# Altium PCB LV1.PCBDOC (part 2 of 2)
Units mm, origin at the board's own origin, x right, y up, seen from the top; angles counter-clockwise.
Board outline 220.06 x 100 mm, 4 copper layers (Component Side, Signal Layer 1, Signal Layer 2, Bottom Layer), stack 0.905 mm thick; 187 components, 117 nets, 633 pads, 195 vias.
Unrouted connection lines stored in the file: 13.
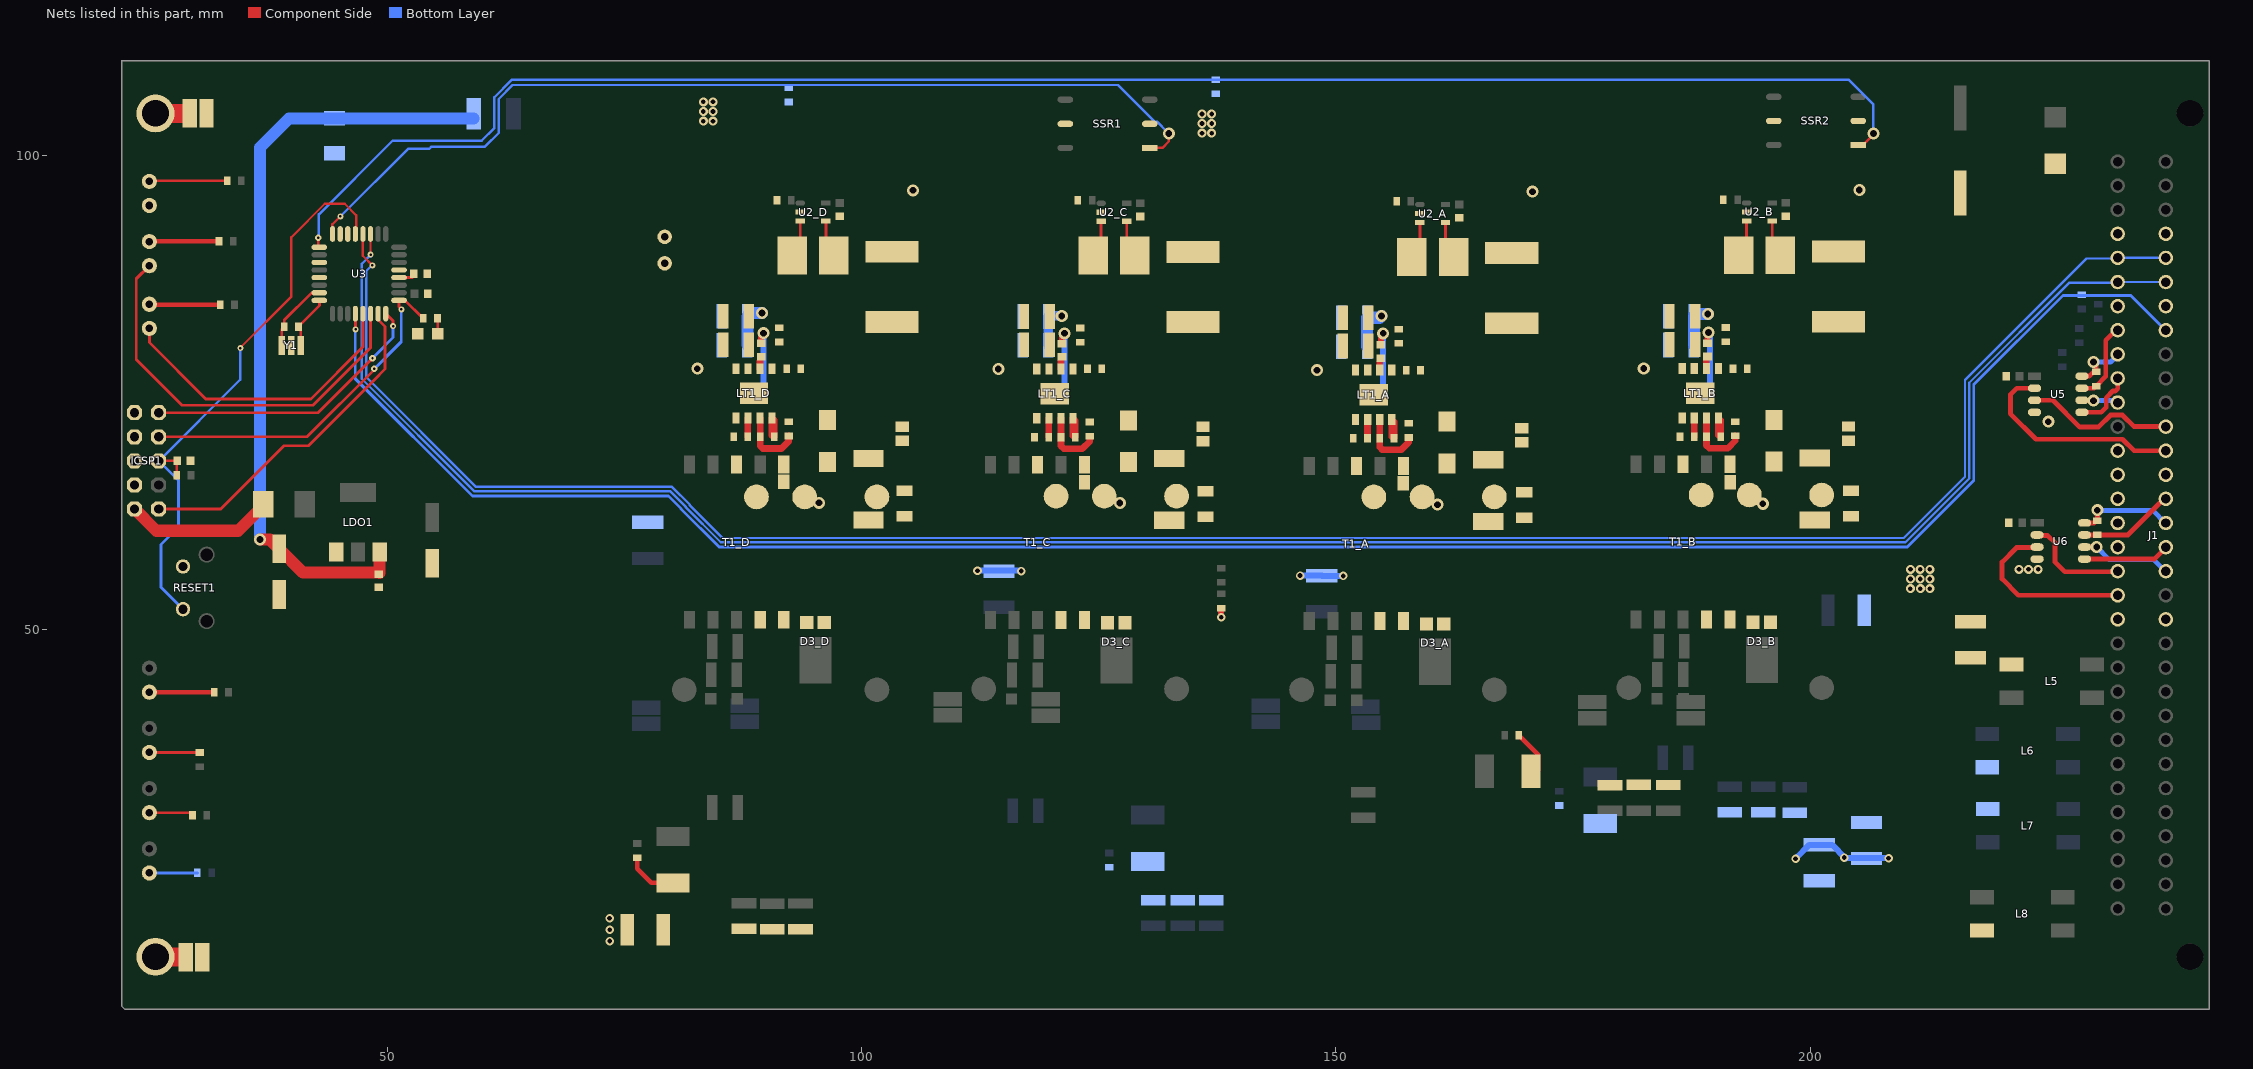
[diagram p4: the nets of this part, all layers, seen from the top]

## Via types
v1: diameter 1.27, hole 0.711, Component Side to Bottom Layer, 133 vias
v2: diameter 0.95, hole 0.5, Component Side to Bottom Layer, 24 vias
v3: diameter 0.635, hole 0.254, Component Side to Bottom Layer, 14 vias
v4: diameter 0.9, hole 0.5, Component Side to Bottom Layer, 13 vias
v5: diameter 0.762, hole 0.381, Component Side to Bottom Layer, 4 vias
v6: diameter 0.672, hole 0.381, Component Side to Bottom Layer, 4 vias
v7: diameter 0.7, hole 0.254, Component Side to Bottom Layer, 3 vias

## Nets (pads, with @x,y where several pads share a name; then routed paths per layer and width w, separated by ;. In a path a pad name is that pad's centre, name@x,y a point inside that pad or via, vN(x,y) a via of type N, cw(c..) or ccw(c..) an arc to the next point about the centre after c; other vN are vias at no path point) (continued)
ADRS3: J1.7 R18.2 U3.12 | length 223.5
  Component Side w0.3: v3@46.64,81.64 U3.12@46.64,83.34
  Bottom Layer w0.3: v3@46.63,81.66 46.63,76.483 58.988,64.125 79.647,64.125 80.97,62.802 80.97,62.747 84.958,58.759 210.236,58.759 217.241,65.764 217.241,75.852 226.631,85.242 233.782,85.242 J1.7@237.49,81.534
  other v3: 46.664,81.688
AREF: AC1.2 U3.20 | length 1.4
  Component Side w0.3: U3.20@51.24,87.14 AC1.2@52.66,87.14
DIB: J1.11 U5.3 | length 16.1
  Component Side w0.508: U5.3@223.64,74.209 225.591,74.209 228.426,71.374 230.378,71.374 231.648,72.644 231.904,72.644 231.906,72.646 232.914,72.646 234.13,71.43 J1.11@237.49,71.43
EN1: AR4.2 SSR1.1 U3.32 | length 101.9
  Component Side w0.254: U3.32@44.21,92.24 44.21,92.744 v3(45.054,93.588) ; SSR1.1@130.378,100.813 131.708,100.813 132.385,101.49 v1(132.385,102.337)
  Bottom Layer w0.254: v3@45.09,93.6 52.2,100.71 54.43,100.71 54.66,100.94 60.3,100.94 61.747,102.387 61.747,105.969 63.221,107.442 127.025,107.442 130.886,103.581 131.14,103.581 v1@132.258,102.464
EN2: AR5.2 SSR2.1 U3.1 | length 181.2
  Component Side w0.254: U3.1@42.74,90.41 42.744,90.414 v7(42.744,91.338) ; SSR2.1@205.054,101.117 205.562,101.117 206.68,102.235 v1(206.68,102.337) v1@206.578,102.235
  Bottom Layer w0.254: v7@42.8,91.41 42.8,93.8 50.575,101.575 59.969,101.575 61.293,102.899 61.293,106.157 63.112,107.975 204.089,107.975 206.629,105.435 v1@206.629,102.591
GND: AC1.1 AC2.1 AC3.2 AC4.1 AR4.1 AR5.1 C1.2 C2.2 C3_A.1 C3_B.1 C3_C.1 C3_D.1 C4_A.1 C4_B.1 C4_C.1 C4_D.1 C6_A.1 C6_B.1 C6_C.1 C6_D.1 C7_A.1 C7_B.1 C7_C.1 C7_D.1 C8_A.1 C8_B.1 C8_C.1 C8_D.1 C11_A.2 C11_B.2 C11_C.2 C11_D.2 C25.1 C26.1 C39.1 C40.2 C45.1 C46.1 C47.1 C48.1 C49.2 C50.1 C51.2 DTVS1.2 DTVS2.2 ICSP1.4 ICSP1.6 ICSP1.8 ICSP1.10 J1.3 J1.6 J1.13 J1.19 J1.35 J1.38 J1.44 J1.45 J1.46 J1.47 J1.48 J1.51 LDO1.1 LED1.C LED2.1 LT1_A.4 LT1_B.4 LT1_C.4 LT1_D.4 NTC1.1 pad.2@94,64.02 pad.2@125.58,64.1 pad.2@159.08,64.02 pad.2@193.58,64.22 pad.3@79.248,91.44 pad.4 pad.7@30.5,15.5 pad.7@30.95,104.45 R1_A.1 R1_B.1 R1_C.1 R1_D.1 R5_A.1 R5_B.1 R5_C.1 R5_D.1 RESET1.1 Rref1_A.2 Rref1_B.2 Rref1_C.2 Rref1_D.2 SSR1.2 SSR2.2 U2_A.2 U2_B.2 U2_C.2 U2_D.2 U3.3 U3.5 U3.21 U5.4 U6.4 Y1.2 | length 48.1
  Component Side w0.635: C11_D.2@89.408,80.202 89.408,81.026 v1(89.662,81.28) ; C11_C.2@121.128,80.182 121.128,81.006 v1(121.382,81.26) ; v4@137.91,51.45 NTC1.1@137.91,52.3 ; C11_A.2@154.728,80.052 154.728,80.876 v1@154.982,81.13 ; C11_B.2@189.168,80.222 189.168,81.046 v1@189.422,81.3
  Bottom Layer w0.635: 89.662,75.692 v1(89.662,81.28) ; v4(112.22,56.24) 114.05,56.24 114.06,56.25 v4@116.93,56.25 ; 121.382,75.672 v1(121.382,81.26) ; v4(146.22,55.73) 148.53,55.73 C45.1@148.56,55.7 ; C45.1@148.61,55.69 v4(150.77,55.69) ; 154.982,75.542 v1@154.982,81.13 ; 189.422,75.712 v1@189.422,81.3 ; v4(198.45,25.89) 199.9,27.34 C49.2@200.87,27.34 ; C49.2@200.94,27.35 202.3,27.35 v4@203.71,25.94 ; v4@203.74,25.91 v4@203.71,25.94 ; v4@208.19,25.94 v4@203.71,25.94
  other v1: 160.7,63.2 195,63.3 127.22,63.38 95.5,63.4 225.1,71.95 148.01,77.384 114.41,77.514 82.69,77.534 182.45,77.554 154.982,81.26 189.282,81.36 170.73,96.192 105.41,96.342 205.17,96.362
  other v2: 210.55,54.35 211.6,54.35 212.6,54.35 210.566,55.372 211.582,55.372 212.598,55.372 210.566,56.388 211.582,56.388 212.598,56.388 221.996,56.388 223.012,56.388 224.028,56.388 135.89,102.362 136.906,102.362 135.89,103.378 136.906,103.378 83.312,103.632 84.328,103.632 135.89,104.394 136.906,104.394 83.312,104.648 84.328,104.648 83.312,105.664 84.328,105.664
  other v4: 73.46,17.2 73.45,18.39 73.44,19.6 208.26,25.94 203.59,26 137.9,51.34 116.84,56.2
LED1: D9.1 U3.14 | length 43.2
  Component Side w0.3: D9.1@24.924,88.392 23.55,87.018 23.55,78.51 28.38,73.68 42.18,73.68 48.24,79.74 U3.14@48.24,83.29
LED2: D10.1 U3.13 | length 32.2
  Component Side w0.3: D10.1@24.924,81.788 24.924,80.296 30.87,74.35 41.96,74.35 47.46,79.85 U3.13@47.46,83.29
MISO: ICSP1.9 U3.16 | length 30.8
  Component Side w0.3: ICSP1.9@25.908,72.898 42.698,72.898 v7@48.385,78.585 ; U3.16@49.85,83.35 50.614,82.586 v3(50.614,82.018)
  Bottom Layer w0.3: v7(48.444,78.638) 50.62,80.814 v3@50.62,82.02
MOSI: ICSP1.1 U3.15 | length 36
  Component Side w0.3: ICSP1.1@25.908,62.738 32.448,62.738 39.12,69.41 41.69,69.41 41.69,69.42 42.057,69.787 42.057,69.79 48.57,76.303 48.573,76.303 49.76,77.49 49.76,81.986 49.03,82.716 49.03,83.22 U3.15@49.01,83.24
NetAC2_2: AC2.2 C1.1 DTVS1.1 F1.2 LDO1.3 | length 81.1
  Component Side w1.27: v1(36.59,59.52) 37.62,59.52 C1.1@38.51,58.63 ; C1.1@38.608,58.547 41.105,56.05 AC2.2@49.15,56.05 ; AC2.2@49.19,56.01 LDO1.3@49.19,58.23
  Bottom Layer w1.27: v1@36.6,59.6 36.6,100.862 39.624,103.886 F1.2@59.114,103.886
NetAR2_1: AR2.1 LED1.A | length 1.6
  Component Side w0.254: LED1.A@55.33,81.23 AR2.1@55.33,82.81
NetAR6_2: AR6.2 LED2.2 | length 8
  Component Side w0.3: LED2.2@25.146,97.344 AR6.2@33.12,97.344
NetC4_A_2: C4_A.2 C5_A.2 C6_A.2 C7_A.2 C8_A.2 D2_A.1 F2_A.2 LT1_A.3 pad.1@154,64.02 pad.7@157.1,65.45 R3_A.2 T1_A.5 | length 4.6
  Bottom Layer w1.27: C8_A.2@153.284,79.86 C7_A.2@153.284,82.908 154.608,82.908 v1(154.8,83.1)
NetC4_B_2: C4_B.2 C5_B.2 C6_B.2 C7_B.2 C8_B.2 D2_B.1 F2_B.2 LT1_B.3 pad.1@188.5,64.22 pad.7@191.55,65.55 R3_B.2 T1_B.5 | length 4.6
  Bottom Layer w1.27: C8_B.2@187.724,80.03 C7_B.2@187.724,83.078 187.946,83.3 v1(189.2,83.3)
NetC4_C_2: C4_C.2 C5_C.2 C6_C.2 C7_C.2 C8_C.2 D2_C.1 F2_C.2 LT1_C.3 pad.1@120.5,64.1 pad.7@123.5,65.55 R3_C.2 T1_C.5 | length 4.5
  Bottom Layer w1: C8_C.2@119.684,79.99 C7_C.2@119.684,83.038 119.746,83.1 v1(121.1,83.1)
NetC4_D_2: C4_D.2 C5_D.2 C6_D.2 C7_D.2 C8_D.2 D2_D.1 F2_D.2 LT1_D.3 pad.1@88.92,64.02 pad.7@91.8,65.6 R3_D.2 T1_D.5 | length 4.7
  Bottom Layer w1.27: C8_D.2@87.964,80.01 C7_D.2@87.964,83.058 88.306,83.4 v1(89.5,83.4)
NetC5_A_1: C5_A.1 R4_A.2
NetC5_B_1: C5_B.1 R4_B.2
NetC5_C_1: C5_C.1 R4_C.2
NetC5_D_1: C5_D.1 R4_D.2
NetC11_A_1: C11_A.1 LT1_A.2 | length 0.8
  Component Side w0.7: LT1_A.2@154.614,77.384 154.614,78.203
NetC11_B_1: C11_B.1 LT1_B.2 | length 0.8
  Component Side w0.7: LT1_B.2@189.054,77.554 189.054,78.373
NetC11_C_1: C11_C.1 LT1_C.2 | length 0.8
  Component Side w0.7: LT1_C.2@121.014,77.514 121.014,78.333
NetC11_D_1: C11_D.1 LT1_D.2 | length 0.8
  Component Side w0.7: LT1_D.2@89.294,77.534 89.294,78.353
NetC27_2: C27.2 C28.2 C29.2 C51.1 L1.1 L5.1 R24.1 | length 4.6
  Component Side w0.5: R24.1@169.28,38.91 171.34,36.85 L1.1@171.34,35.17
NetC31_2: C31.2 C32.2 C33.2 C50.2 L2.1 L6.3 R25.2
NetC35_1: C35.1 C36.1 C37.1 C49.1 L3.1 L7.4 R26.2
NetC41_1: C41.1 C42.1 C43.1 C48.2 L4.1 L8.2 R31.1 | length 5.8
  Component Side w0.5: R31.1@76.36,25.98 76.36,24.84 77.84,23.36 L4.1@80.43,23.36
NetD1_2: D1.2 ICSP1.2 | length 15.8
  Component Side w1.27: ICSP1.2@23.368,62.738 25.654,60.452 34.29,60.452 D1.2@37.084,63.246
NetD2_A_2: D2_A.2 D5_A.1 pad.6@166.7,64.02
NetD2_B_2: D2_B.2 D5_B.1 pad.6@201.2,64.22
NetD2_C_2: D2_C.2 D5_C.1 pad.6@133.2,64.1
NetD2_D_2: D2_D.2 D5_D.1 pad.6@101.62,64.02
NetD3_A_1: D3_A.1 T1_A.6 T1_A.7
NetD3_B_1: D3_B.1 T1_B.6 T1_B.7
NetD3_C_1: D3_C.1 T1_C.6 T1_C.7
NetD3_D_1: D3_D.1 T1_D.6 T1_D.7
NetD9_2: D9.2 R27.1 | length 7.4
  Component Side w0.5: D9.2@24.892,90.983 R27.1@32.27,90.983
NetD10_2: D10.2 R28.1 | length 7.5
  Component Side w0.5: D10.2@24.943,84.277 R28.1@32.397,84.277
NetD11_1: D11.1 R30.1 | length 5.3
  Bottom Layer w0.3: D11.1@24.67,24.384 R30.1@29.984,24.384
NetD12_1: D12.1 R32.1 | length 4.6
  Component Side w0.3: D12.1@24.67,30.734 R32.1@29.222,30.734
NetD13_1: D13.1 R33.1 | length 5.3
  Component Side w0.3: D13.1@24.67,37.084 R33.1@29.984,37.084
NetD14_1: D14.1 R34.1 | length 6.5
  Component Side w0.5: D14.1@25.146,43.434 R34.1@31.662,43.434
NetF2_A_1: F2_A.1 R2_A.2 U2_A.4 | length 2.8
  Component Side w0.3: R2_A.2@161.552,90.172 U2_A.4@161.552,92.944
NetF2_B_1: F2_B.1 R2_B.2 U2_B.4 | length 2.8
  Component Side w0.3: R2_B.2@195.992,90.342 U2_B.4@195.992,93.114
NetF2_C_1: F2_C.1 R2_C.2 U2_C.4 | length 2.8
  Component Side w0.3: R2_C.2@127.952,90.302 U2_C.4@127.952,93.074
NetF2_D_1: F2_D.1 R2_D.2 U2_D.4 | length 2.8
  Component Side w0.3: R2_D.2@96.232,90.322 U2_D.4@96.232,93.094
NetJ1_14: J1.14 R23.1 U6.7 | length 10.1
  Component Side w0.508: U6.7@228.914,60.008 233.49,60.008 237.236,63.754 J1.14@237.49,63.754
NetJ1_15: J1.15 R23.2 U6.8 | length 10.5
  Component Side w0.508: U6.8@228.914,61.278 229.934,61.278 R23.2@230.264,61.608 ; v1(230.264,62.624) R23.2@230.264,61.608 ; R23.2@230.378,61.722 R23.2@230.264,61.608
  Bottom Layer w0.508: v1(230.264,62.624) 230.294,62.594 236.11,62.594 J1.15@237.49,61.214
NetJ1_16: J1.16 U6.5 | length 9.1
  Component Side w0.508: U6.5@228.914,57.468 236.284,57.468 J1.16@237.49,58.674
NetJ1_17: J1.17 U6.6 | length 9.7
  Component Side w0.508: U6.6@228.914,58.738 v1(230.188,58.738)
  Bottom Layer w0.508: v1(230.188,58.738) 231.52,57.406 232.914,57.406 232.916,57.404 236.22,57.404 J1.17@237.49,56.134
NetJ1_39: J1.39 R22.2 U5.7 | length 8.3
  Component Side w0.508: U5.7@228.64,75.479 R22.2@229.911,75.479 ; R22.2@230.124,75.704 231.14,76.72 231.14,80.518 J1.39@232.41,81.788
NetJ1_40: J1.40 R22.1 U5.8 | length 5.4
  Component Side w0.508: U5.8@228.64,76.749 229.403,76.749 R22.1@229.87,77.216 ; v1(229.87,78.232) 230.124,77.978 R22.1@230.124,77.204
  Bottom Layer w0.508: v1(229.87,78.232) 231.648,78.232 J1.40@232.41,78.994
NetJ1_41: J1.41 U5.5 | length 6.4
  Component Side w0.508: U5.5@228.64,72.939 230.673,72.939 231.194,73.46 231.194,74.474 231.906,75.186 232.158,75.186 232.41,75.438 J1.41@232.41,76.454
NetJ1_42: J1.42 U5.6 | length 3.9
  Component Side w0.508: U5.6@228.64,74.209 229.829,74.209 v1(229.87,74.168)
  Bottom Layer w0.508: v1(229.87,74.168) 232.156,74.168 J1.42@232.41,73.914
NetLT1_A_1: LT1_A.1 R3_A.1 R5_A.2
NetLT1_A_6: LT1_A.6 Rfb1_A.1 | length 2
  Component Side w0.7: Rfb1_A.1@153.332,70.189 LT1_A.6@153.332,72.165
NetLT1_A_7: LT1_A.7 Rref1_A.1 Rtc1_A.2 | length 6.9
  Component Side w0.7: LT1_A.7@154.626,72.165 Rtc1_A.2@154.626,70.189 154.626,69.268 154.916,68.978 156.876,68.978 157.662,69.764 Rref1_A.1@157.662,70.284
NetLT1_A_8: LT1_A.8 Rtc1_A.1 | length 3.9
  Component Side w0.7: Rtc1_A.1@155.884,70.347 LT1_A.8@155.884,72.177 156.126,71.935 Rtc1_A.1@156.126,70.189
NetLT1_B_1: LT1_B.1 R3_B.1 R5_B.2
NetLT1_B_6: LT1_B.6 Rfb1_B.1 | length 2
  Component Side w0.7: Rfb1_B.1@187.772,70.359 LT1_B.6@187.772,72.335
NetLT1_B_7: LT1_B.7 Rref1_B.1 Rtc1_B.2 | length 6.9
  Component Side w0.7: LT1_B.7@189.066,72.335 Rtc1_B.2@189.066,70.359 189.066,69.438 189.356,69.148 191.316,69.148 192.102,69.934 Rref1_B.1@192.102,70.454
NetLT1_B_8: LT1_B.8 Rtc1_B.1 | length 3.9
  Component Side w0.7: Rtc1_B.1@190.324,70.517 LT1_B.8@190.324,72.347 190.566,72.105 Rtc1_B.1@190.566,70.359
NetLT1_C_1: LT1_C.1 R3_C.1 R5_C.2
NetLT1_C_6: LT1_C.6 Rfb1_C.1 | length 2
  Component Side w0.7: Rfb1_C.1@119.732,70.319 LT1_C.6@119.732,72.295
NetLT1_C_7: LT1_C.7 Rref1_C.1 Rtc1_C.2 | length 6.9
  Component Side w0.7: LT1_C.7@121.026,72.295 Rtc1_C.2@121.026,70.319 121.026,69.398 121.316,69.108 123.276,69.108 124.062,69.894 Rref1_C.1@124.062,70.414
NetLT1_C_8: LT1_C.8 Rtc1_C.1 | length 3.9
  Component Side w0.7: Rtc1_C.1@122.284,70.477 LT1_C.8@122.284,72.307 122.526,72.065 Rtc1_C.1@122.526,70.319
NetLT1_D_1: LT1_D.1 R3_D.1 R5_D.2
NetLT1_D_6: LT1_D.6 Rfb1_D.1 | length 2
  Component Side w0.7: Rfb1_D.1@88.012,70.339 LT1_D.6@88.012,72.315
NetLT1_D_7: LT1_D.7 Rref1_D.1 Rtc1_D.2 | length 6.9
  Component Side w0.7: LT1_D.7@89.306,72.315 Rtc1_D.2@89.306,70.339 89.306,69.418 89.596,69.128 91.556,69.128 92.342,69.914 Rref1_D.1@92.342,70.434
NetLT1_D_8: LT1_D.8 Rtc1_D.1 | length 3.9
  Component Side w0.7: Rtc1_D.1@90.564,70.497 LT1_D.8@90.564,72.327 90.806,72.085 Rtc1_D.1@90.806,70.339
RESET: AC3.1 AR3.1 ICSP1.5 RESET1.2 U3.29 | length 61.5
  Component Side w0.254: ICSP1.5@25.908,67.818 AC3.1@27.788,67.818 ; v3@34.445,79.695 39.89,85.14 39.89,91.39 43.42,94.92 45.52,94.92 46.74,93.7 U3.29@46.74,91.79
  Component Side w0.3: AR3.1@27.81,66.32 AC3.1@27.81,67.76
  Bottom Layer w0.254: ICSP1.5@25.98,67.85 34.51,76.38 v3(34.51,79.7)
  Bottom Layer w0.3: ICSP1.5@25.99,67.76 28.01,65.74 28.01,60.856 26.162,59.008 26.162,54.497 RESET1.2@28.473,52.186
ROB: J1.12 U5.2 | length 22.8
  Component Side w0.508: U5.2@223.64,75.479 221.779,75.479 221.1,74.8 221.1,72.8 223.796,70.104 231.904,70.104 231.906,70.106 232.914,70.106 234.13,68.89 J1.12@237.49,68.89
RX0: U3.30
RXA: J1.49 U6.2 | length 11.2
  Component Side w0.508: U6.2@224.028,59.944 225.044,59.944 225.806,59.182 225.806,57.15 226.822,56.134 232.354,56.134 J1.49@232.41,56.19
SCK: AR2.2 ICSP1.7 U3.17 | length 37.5
  Component Side w0.3: ICSP1.7@25.908,70.358 41.548,70.358 v7@48.65,77.46 ; v3@51.51,83.78 51.24,84.05 U3.17@51.24,84.74 51.88,84.74 AR2.2@53.76,82.86
  Bottom Layer w0.3: v7(48.624,77.518) 51.48,80.374 v3@51.48,83.78
  other v3: 51.484,83.798
SCL: J1.4 J1.36 U3.28 | length 230.8
  Component Side w0.254: U3.28@47.42,91.81 47.42,89.442 v3(48.434,88.428)
  Bottom Layer w0.254: v3@48.374,88.404 47.79,87.82 47.78,87.82 47.78,78.931 47.767,78.918 47.767,78.358 47.78,78.345 47.78,76.65 59.35,65.08 80.009,65.08 81.901,63.188 81.901,63.133 85.344,59.69 209.85,59.69 216.31,66.15 216.31,76.35 229.114,89.154 232.354,89.154 J1.36@232.41,89.21 J1.4@237.49,89.21
SDA: J1.5 J1.37 U3.27 | length 230.3
  Component Side w0.254: v3@48.24,89.75 U3.27@48.24,91.74 U3.27@48.24,91.78 ; v3(48.25,89.55) v3@48.25,89.76
  Bottom Layer w0.254: v3@48.3,89.41 48.144,89.41 47.313,88.579 47.313,76.475 59.162,64.626 79.821,64.626 81.447,63 81.447,62.945 85.156,59.236 210.038,59.236 216.764,65.962 216.764,76.05 227.328,86.614 J1.37@232.41,86.614 ; J1.37@232.41,86.67 J1.5@237.49,86.67
Shield: pad.2@25.57,15.549 pad.2@25.57,104.444 pad.7@28.75,15.5 pad.7@29.2,104.45 | length 6
  Component Side w2: pad.2@25.576,104.45 pad.7@28.85,104.45 ; pad.2@25.619,15.5 pad.7@28.35,15.5
SW_A: D5_A.2 LT1_A.5 R4_A.1 Rfb1_A.2 T1_A.3
SW_B: D5_B.2 LT1_B.5 R4_B.1 Rfb1_B.2 T1_B.3
SW_C: D5_C.2 LT1_C.5 R4_C.1 Rfb1_C.2 T1_C.3
SW_D: D5_D.2 LT1_D.5 R4_D.1 Rfb1_D.2 T1_D.3
TX0: U3.31
TXA: J1.50 U6.3 | length 18.9
  Component Side w0.508: U6.3@223.774,58.674 221.742,58.674 220.218,57.15 220.218,55.372 221.94,53.65 J1.50@232.41,53.65
VINA: R2_C.1 R2_D.1 SSR1.5 U2_C.3 U2_D.3 | length 5.5
  Component Side w0.3: R2_D.1@93.532,90.322 U2_D.3@93.532,93.094 ; R2_C.1@125.252,90.302 U2_C.3@125.252,93.074
VINB: R2_A.1 R2_B.1 SSR2.5 U2_A.3 U2_B.3 | length 5.5
  Component Side w0.3: R2_A.1@158.852,90.172 U2_A.3@158.852,92.944 ; R2_B.1@193.292,90.342 U2_B.3@193.292,93.114
XTAL1: AR1.1 U3.7 Y1.3 | length 7.6
  Component Side w0.3: Y1.3@38.874,80 38.874,81.644 AR1.1@39.15,81.92 ; AR1.1@39.14,81.98 39.14,82.66 42.01,85.53 U3.7@42.8,85.53
XTAL2: AR1.2 U3.8 Y1.1 | length 5.7
  Component Side w0.3: Y1.1@40.89,80 40.89,81.75 40.65,81.99 42.86,84.2 U3.8@42.86,84.71
pads on no net: C39.2 ICSP1.3 J1.0@240.03,15.55 J1.0@240.03,104.45 RESET1.0 SSR1.3 SSR2.3 T1_A.1 T1_A.2 T1_A.4 T1_A.8 T1_B.1 T1_B.2 T1_B.4 T1_B.8 T1_C.1 T1_C.2 T1_C.4 T1_C.8 T1_D.1 T1_D.2 T1_D.4 T1_D.8 U3.2 U3.22

## Polygon pours and split planes (outlines as drawn)
+5VBRTN on Bottom Layer "-5VA_L01_P619" (solid, pour order 3916): 150.246,53.902 141.102,53.902 141.102,41.2 150.246,41.2
+5VARTN on Bottom Layer "-5VA_L01_P619" (solid, pour order 3918): 116.626,54.102 107.482,54.102 107.482,34.036 116.626,34.036
+5VGNDA on Bottom Layer "Component Side-No Net 2" (solid, pour order 3909): 225.64,24.775 225.64,29.22 237.99,29.22 238.48,28.73 238.48,25.19 238.08,24.79
+5VA_FILTERED on Bottom Layer "Component Side-No Net 2" (solid, pour order 3908): 225.78,29.835 225.78,34.28 238.05,34.28 238.54,33.79 238.54,30.25 238.14,29.85
NetC31_2 on Bottom Layer "Component Side-No Net 2" (solid, pour order 3901): 212.37,31.05 216.03,34.71 219.9,34.71 219.9,36.36 213.7,36.36 208.39,31.05
-5VBRTN on Bottom Layer "Component Side-No Net 2" (solid, pour order 3902): 206.591,35.461 211.01,39.88 219.9,39.88 219.9,38.05 213.05,38.05 210.461,35.461
GND on Bottom Layer "GND_L02_P1210" (solid, pour order 3935): 22.86,109.354 238.16,109.354 238.16,60.84 22.86,60.84
+5V on Bottom Layer "Component Side-No Net" (solid, pour order 3914): 42.814,59.368 40.314,59.368 40.314,65.968 40.386,66.04 53.34,66.04 53.34,59.368 44.45,59.368
NetC35_1 on Bottom Layer "Component Side-No Net" (solid, pour order 3930): 125.65,24.85 125.65,20.33 208.33,20.33 208.33,24.85
NetC31_2 on Bottom Layer "Component Side-No Net" (solid, pour order 3915): 173.03,28.61 173.03,31.67 213.02,31.67 209.96,28.61
-5VB on Bottom Layer "Component Side-No Net" (solid, pour order 3920): 184.211,33.022 174.805,33.022 174.805,54.07 184.211,54.07
-5VBRTN on Bottom Layer "Component Side-No Net" (solid, pour order 3907): 194.818,32.45 194.818,36.11 211.11,36.11 207.45,32.45
GND on Bottom Layer "Component Side-No Net" (solid, pour order 3934): 23.045,60.96 23.114,60.891 23.114,17.79 71.51,17.79 71.51,54.851 76.11,60.96
+5VB on Bottom Layer "Component Side-No Net" (solid, pour order 3925): 151.581,41.1 151.581,49.612 165.4,49.612 165.4,41.1
GND on Bottom Layer "GNDbottom" (solid, pour order 3933): 176.315,101.813 176.315,63.326 142.36,63.326 142.36,101.813
-5VBRTN on Bottom Layer "-5VGNDB_L02_P638" (solid, pour order 3928): 202.6,32.454 186.45,32.454 186.45,53.75 202.6,53.75
SW_D on Bottom Layer "SW_LV4_L01_P595" (solid, pour order 3913): 106.058,60.516 85.23,60.516 85.23,72.962 87.262,72.962 87.262,65.088 87.516,64.834 89.294,63.056 89.802,62.548 106.058,62.548
GND on Bottom Layer "Component Side-No Net 2" (solid, pour order 3926): 210.058,50.292 210.058,60.96 237.998,60.96 238.252,60.706 238.252,50.292
GND on Bottom Layer "Component Side-No Net 2" (solid, pour order 3903): 204.98,53.788 212.832,53.788 213.594,53.026 213.848,52.772 213.848,50.232 204.98,50.232
+5VA on Bottom Layer "Component Side-No Net" (solid, pour order 3927): 117.821,29.56 117.821,49.703 131,49.703 131,29.56
+5VARTN on Bottom Layer "Component Side-No Net" (solid, pour order 3932): 107.4,14.559 107.4,19.601 209.79,19.601 209.79,14.502
+5VARTN on Bottom Layer "Component Side-No Net" (solid, pour order 3929): 116.58,14.725 116.58,52.818 107.39,52.818 107.39,14.713
-5VA on Bottom Layer "-5VA_L01_P619" (solid, pour order 3917): 84.976,54.102 75.832,54.102 75.832,41.2 84.976,41.2
-5VARTN on Bottom Layer "Component Side-No Net 2" (solid, pour order 3904): 86.106,57.15 86.106,54.61 75.946,54.61 75.946,58.166 82.55,58.166 83.566,57.15 83.82,57.15
-5VARTN on Bottom Layer "-5VGNDA_L02_P642" (solid, pour order 3931): 99.4,41.2 86.106,41.2 86.106,57.976 99.4,57.976
NetC35_1 on Bottom Layer "Component Side-No Net 2" (solid, pour order 3906): 219.94,32.27 219.98,32.23 219.98,29.6 218,29.6 208.7,20.3 207.21,20.3 207.21,24.84 209.13,24.84 216.56,32.27
+5VARTN on Bottom Layer "Component Side-No Net 2" (solid, pour order 3905): 217.48,28.35 217.48,26.99 217.51,26.96 210.09,19.54 209.66,19.54 209.66,14.47 209.76,14.57 220.22,25.03 220.22,28.35
-5VA on Bottom Layer "Component Side-No Net 1" (solid, pour order 3943): 75.8,39.5 101.7,39.5 101.971,39.771 101.971,44.071 102.5,44.6 105.3,44.6 105.3,37.5 103.4,35.6 75.8,35.6
+5VBRTN on Bottom Layer "Component Side-No Net 1" (solid, pour order 3955): 141.1,39.55 167,39.55 167.271,39.821 167.271,44.121 167.8,44.65 170.6,44.65 170.6,37.55 168.7,35.65 141.1,35.65
GND on Component Side "GND_L01_P3936" (solid, pour order 3936): 75.17,20.05 75.15,20.07 73,20.07 73,16.93 73,16.74 73.37,16.74 74.92,16.74 75.15,16.74
-5VBRTN on Component Side "-5VGNDA_L01_P620" (solid, pour order 3881): 200.8,49.53 200.8,41.7 185.916,41.7 185.916,49.53
-5VB on Component Side "-5VA_L01_P619" (solid, pour order 3880): 184.646,54.102 175.502,54.102 175.502,41.7 184.646,41.7
+5VB on Component Side "-5VGNDA_L01_P620" (solid, pour order 3890): 165.4,49.33 165.4,31.98 151.516,31.98 151.516,49.33
+5VBRTN on Component Side "-5VA_L01_P619" (solid, pour order 3884): 150.246,53.902 141.102,53.902 141.102,27.09 150.246,27.09
+5VA on Component Side "-5VGNDA_L01_P620" (solid, pour order 3891): 132.7,49.53 132.7,41.9 117.896,41.9 117.896,49.53
+5VARTN on Component Side "-5VA_L01_P619" (solid, pour order 3882): 116.626,54.102 107.482,54.102 107.482,41.91 116.626,41.91
GND on Component Side "Component Side-No Net 2" (solid, pour order 3876): 185.74,86.17 185.81,86.1 185.81,79.01 186.86,79.01 186.93,78.94 186.91,78.92 186.91,73.84 175.68,73.84 175.63,73.79 175.68,73.84 175.68,86.26
GND on Component Side "Component Side-No Net 2" (solid, pour order 3875): 151.24,85.95 151.31,85.88 151.31,78.79 152.36,78.79 152.43,78.72 152.41,78.7 152.41,73.62 141.18,73.62 141.13,73.57 141.18,73.62 141.18,86.04
GND on Component Side "Component Side-No Net 2" (solid, pour order 3877): 117.66,85.95 117.73,85.88 117.73,78.79 118.78,78.79 118.85,78.72 118.83,78.7 118.83,73.62 107.6,73.62 107.55,73.57 107.6,73.62 107.6,86.04
VINB on Component Side "Component Side-No Net" (solid, pour order 3863): 193.82,91.448 193.82,87.384 181.378,87.384 181.378,105.368 184.68,105.368 184.68,92.21 185.442,91.448
VINB on Component Side "Component Side-No Net" (solid, pour order 3865): 159.432,91.372 159.432,87.308 146.99,87.308 146.99,105.292 150.292,105.292 150.292,92.134 151.054,91.372
VINA on Component Side "Component Side-No Net" (solid, pour order 3864): 125.882,91.249 125.882,87.185 113.44,87.185 113.44,105.169 116.742,105.169 116.742,92.011 117.504,91.249
NetC4_B_2 on Component Side "NETC11_LV4_2_L01_P618" (solid, remove dead copper, pour order 3888): 205.932,86.126 187.39,86.126 187.39,76.982 191.708,76.982 191.708,66.568 192.47,66.568 195.518,70.886 196.788,70.886 205.932,70.886
GND on Component Side "Component Side-No Net" (solid, pour order 3868): 206.658,93.11 206.658,100.476 190.832,100.476 190.832,93.11
GND on Component Side "GND_L01_P564" (solid, pour order 3819): 194.388,78.074 194.388,75.522 194.388,73.49 192.61,73.49 192.61,76.538 192.864,76.538 192.864,78.074
NetD3_B_1 on Component Side "NETD7_LV4_1_L01_P604" (solid, pour order 3852): 202.039,50.05 202.039,54.114 187.815,54.114 187.815,50.05
SW_B on Component Side "SW_LV4_L01_P595" (solid, pour order 3859): 205.818,60.536 184.99,60.536 184.99,72.982 187.022,72.982 187.022,65.108 187.276,64.854 189.054,63.076 189.562,62.568 205.818,62.568
NetF2_B_1 on Component Side "NETF2_LV4_1_L01_P581" (solid, pour order 3840): 205.818,87.268 197.436,87.268 197.436,88.573 197.436,91.332 198.579,91.332 205.818,91.332
NetD2_B_2 on Component Side "NETD8_LV4_2_L01_P586" (solid, pour order 3843): 202.77,69.172 195.15,69.172 195.15,64.6 202.77,64.6
NetC5_B_1 on Component Side "NETC13_LV4_1_L01_P575" (solid, pour order 3829): 205.818,64.092 203.024,64.092 203.024,70.442 205.818,70.442
NetLT1_B_1 on Component Side "NETLT2_LV4_1_L01_P568" (solid, pour order 3825): 192.703,80.792 189.93,80.792 189.816,76.792 192.703,76.792
GND on Component Side "GND_L01_P577" (solid, pour order 3837): 181.434,76.03 192.698,76.03 192.698,71.712 191.594,71.712 191.594,72.829 190.68,73.744 181.434,73.744
NetC4_A_2 on Component Side "NETC11_LV4_2_L01_P618" (solid, remove dead copper, pour order 3887): 171.492,85.956 152.95,85.956 152.95,76.812 157.268,76.812 157.268,66.398 158.03,66.398 161.078,70.716 162.348,70.716 171.492,70.716
GND on Component Side "Component Side-No Net" (solid, pour order 3870): 172.218,92.94 172.218,100.306 156.392,100.306 156.392,92.94
GND on Component Side "GND_L01_P564" (solid, pour order 3818): 159.948,77.904 159.948,75.352 159.948,73.32 158.17,73.32 158.17,76.368 158.424,76.368 158.424,77.904
NetD3_A_1 on Component Side "NETD7_LV4_1_L01_P604" (solid, pour order 3854): 167.568,49.888 167.568,53.952 153.344,53.952 153.344,49.888
SW_A on Component Side "SW_LV4_L01_P595" (solid, pour order 3858): 171.378,60.366 150.55,60.366 150.55,72.812 152.582,72.812 152.582,64.938 152.836,64.684 154.614,62.906 155.122,62.398 171.378,62.398
NetF2_A_1 on Component Side "NETF2_LV4_1_L01_P581" (solid, pour order 3841): 171.378,87.098 162.996,87.098 162.996,88.403 162.996,91.162 164.139,91.162 171.378,91.162
NetD2_A_2 on Component Side "NETD8_LV4_2_L01_P586" (solid, pour order 3844): 168.33,69.002 160.71,69.002 160.71,64.43 168.33,64.43
NetC5_A_1 on Component Side "NETC13_LV4_1_L01_P575" (solid, pour order 3830): 171.378,63.922 168.584,63.922 168.584,70.272 171.378,70.272
NetLT1_A_1 on Component Side "NETLT2_LV4_1_L01_P568" (solid, pour order 3824): 158.263,80.622 155.49,80.622 155.376,76.622 158.263,76.622
GND on Component Side "GND_L01_P577" (solid, pour order 3836): 146.994,75.86 158.258,75.86 158.258,71.542 157.154,71.542 157.154,72.659 156.24,73.574 146.994,73.574
NetC4_C_2 on Component Side "NETC11_LV4_2_L01_P618" (solid, remove dead copper, pour order 3886): 137.892,86.086 119.35,86.086 119.35,76.942 123.668,76.942 123.668,66.528 124.43,66.528 127.478,70.846 128.748,70.846 137.892,70.846
GND on Component Side "Component Side-No Net" (solid, pour order 3869): 138.618,93.07 138.618,100.436 122.792,100.436 122.792,93.07
GND on Component Side "GND_L01_P564" (solid, pour order 3821): 126.348,78.034 126.348,75.482 126.348,73.45 124.57,73.45 124.57,76.498 124.824,76.498 124.824,78.034
NetD3_C_1 on Component Side "NETD7_LV4_1_L01_P604" (solid, pour order 3853): 133.968,50.018 133.968,54.082 119.744,54.082 119.744,50.018
SW_C on Component Side "SW_LV4_L01_P595" (solid, pour order 3857): 137.778,60.496 116.95,60.496 116.95,72.942 118.982,72.942 118.982,65.068 119.236,64.814 121.014,63.036 121.522,62.528 137.778,62.528
NetF2_C_1 on Component Side "NETF2_LV4_1_L01_P581" (solid, pour order 3839): 137.778,87.228 129.396,87.228 129.396,88.533 129.396,91.292 130.539,91.292 137.778,91.292
NetD2_C_2 on Component Side "NETD8_LV4_2_L01_P586" (solid, pour order 3845): 134.73,69.132 127.11,69.132 127.11,64.56 134.73,64.56
NetC5_C_1 on Component Side "NETC13_LV4_1_L01_P575" (solid, pour order 3827): 137.778,64.052 134.984,64.052 134.984,70.402 137.778,70.402
NetLT1_C_1 on Component Side "NETLT2_LV4_1_L01_P568" (solid, pour order 3823): 124.663,80.752 121.89,80.752 121.776,76.752 124.663,76.752
GND on Component Side "GND_L01_P577" (solid, pour order 3835): 113.394,75.99 124.658,75.99 124.658,71.672 123.554,71.672 123.554,72.789 122.64,73.704 113.394,73.704
+5VGNDB on Component Side "Component Side-No Net 2" (solid, pour order 3849): 228.17,44.51 238.55,44.51 238.55,40.22 238.41,40.08 238.35,40.02 228.17,40.02
+5VB_FILTERED on Component Side "Component Side-No Net 2" (solid, pour order 3848): 228.3,49.49 238.57,49.49 238.57,45.2 238.43,45.06 238.37,45 228.3,45
+5VBRTN on Component Side "Component Side-No Net" (solid, pour order 3892): 210.82,26.84 210.82,31.35 142.494,31.35 142.494,26.84
NetC41_1 on Component Side "Component Side-No Net" (solid, pour order 3833): 78.36,16.74 81.9,16.74 81.9,24.37 78.36,24.37
32V on Component Side "Component Side-No Net" (solid, pour order 3847): 238.252,101.6 238.252,95.758 231.394,95.758 231.394,101.6
NetC27_2 on Component Side "Component Side-No Net" (solid, pour order 3874): 170.7,36.85 170.7,33.4 209.16,33.4 209.16,36.85
NetC41_1 on Component Side "Component Side-No Net" (solid, pour order 3894): 81.469,16.74 81.469,19.34 219.41,19.34 219.41,16.74
-5VARTN on Component Side "Component Side-No Net" (solid, pour order 3895): 219.43,20.33 219.43,23.1 86.22,23.1 86.22,20.33
VINA on Component Side "Component Side-No Net" (solid, pour order 3862): 122.911,102.832 87.198,102.832 87.198,105.245 122.911,105.245
GND on Component Side "Component Side-No Net" (solid, pour order 3897): 210.058,100.394 228.6,100.394 228.6,95.504 228.854,95.25 238.252,95.25 238.252,50.292 210.058,50.292
VINA on Component Side "Component Side-No Net" (solid, pour order 3860): 92.596,91.312 92.596,87.248 87.008,87.248 87.008,105.232 90.31,105.232 90.31,92.074 91.072,91.312 92.85,91.312
GND on Component Side "GND_L01_P626" (solid, pour order 3898): 84.043,60.634 84.043,75.112 87.091,75.112 87.091,78.16 86.583,78.16 86.583,78.284 86.075,78.792 86.075,92.638 86.075,106.608 22.86,106.608 22.86,60.634
GND on Component Side "GND_L01_P577" (solid, pour order 3834): 81.674,76.01 92.938,76.01 92.938,71.692 91.834,71.692 91.834,72.809 90.92,73.724 81.674,73.724
NetLT1_D_1 on Component Side "NETLT2_LV4_1_L01_P568" (solid, pour order 3826): 92.943,80.772 90.17,80.772 90.056,76.772 92.943,76.772
NetC5_D_1 on Component Side "NETC13_LV4_1_L01_P575" (solid, pour order 3828): 106.058,64.072 103.264,64.072 103.264,70.422 106.058,70.422
NetD2_D_2 on Component Side "NETD8_LV4_2_L01_P586" (solid, pour order 3846): 103.01,69.152 95.39,69.152 95.39,64.58 103.01,64.58
NetF2_D_1 on Component Side "NETF2_LV4_1_L01_P581" (solid, pour order 3842): 106.058,87.248 97.676,87.248 97.676,88.553 97.676,91.312 98.819,91.312 106.058,91.312
-5VA on Component Side "-5VA_L01_P619" (solid, pour order 3883): 84.976,54.102 75.832,54.102 75.832,27.29 84.976,27.29
SW_D on Component Side "SW_LV4_L01_P595" (solid, pour order 3856): 106.058,60.516 85.23,60.516 85.23,72.962 87.262,72.962 87.262,65.088 87.516,64.834 89.294,63.056 89.802,62.548 106.058,62.548
NetD3_D_1 on Component Side "NETD7_LV4_1_L01_P604" (solid, pour order 3855): 102.248,50.038 102.248,54.102 88.024,54.102 88.024,50.038
-5VARTN on Component Side "-5VGNDA_L01_P620" (solid, pour order 3896): 101.2,49.53 101.2,20.84 86.246,20.84 86.246,49.53
GND on Component Side "GND_L01_P564" (solid, pour order 3820): 94.628,78.054 94.628,75.502 94.628,73.47 92.85,73.47 92.85,76.518 93.104,76.518 93.104,78.054
GND on Component Side "Component Side-No Net" (solid, pour order 3871): 106.898,93.09 106.898,100.456 91.072,100.456 91.072,93.09
GND on Component Side "Component Side-No Net" (solid, pour order 3878): 211.214,100.394 193.548,100.394 193.548,92.774 211.214,92.774
NetC27_2 on Component Side "Component Side-No Net" (solid, pour order 3879): 220.34,44.613 220.34,48.34 215.53,48.34 198.503,33.293 209.02,33.293
+5VBRTN on Component Side "Component Side-No Net" (solid, pour order 3851): 220.29,36.574 220.29,41.88 209.76,31.35 210.583,26.867
+5V on Component Side "Component Side-No Net 2" (solid, pour order 3866): 56.5,59.69 40.132,59.69 40.132,66.548 56.5,66.548
GND on Component Side "Component Side-No Net 2" (solid, pour order 3893): 22.86,60.706 22.86,11.45 73.85,11.45 73.85,60.706
NetC4_D_2 on Component Side "NETC11_LV4_2_L01_P618" (solid, remove dead copper, pour order 3889): 106.172,86.106 87.63,86.106 87.63,76.962 91.948,76.962 91.948,66.548 92.71,66.548 95.758,70.866 97.028,70.866 106.172,70.866
VINB on Component Side "Component Side-No Net" (solid, pour order 3872): 193.192,102.87 147.03,102.87 147.03,105.562 193.192,105.562
32V on Component Side "Component Side-No Net 2" (solid, pour order 3885): 120.65,108.649 120.65,105.816 197.739,105.816 198.145,105.41 198.171,105.385 198.171,103.48 198.171,103.2 197.79,102.819 197.206,102.235 195.224,102.235 195.224,100.381 195.377,100.228 202.895,100.228 202.895,107.848 202.371,108.372
VINB on Component Side "Component Side-No Net 2" (solid, pour order 3832): 188.118,103.384 190.348,105.613 190.398,105.664 197.282,105.664 197.587,105.664 197.942,105.308 197.942,103.759 197.942,103.403 197.485,102.946 197.409,102.87 189.627,102.87
32V on Component Side "Component Side-No Net 2" (solid, pour order 3850): 120.574,107.747 120.599,107.721 120.599,105.512 123.088,105.512 123.495,105.105 123.52,105.08 123.52,103.175 123.52,102.895 123.139,102.514 123.063,102.438 120.574,102.438 120.574,100.076 120.726,99.924 128.245,99.924 128.245,107.544 128.067,107.721
GND on Component Side "Component Side-No Net 2" (solid, pour order 3861): 128.676,99.56 128.676,105.385 128.854,105.207 141.656,105.207 141.656,99.56
32V on Component Side "Component Side-No Net 2" (solid, pour order 3867): 238.227,101.549 238.227,102.083 233.731,106.578 233.705,106.553 221.92,106.553 209.093,106.553 208.991,106.451 208.788,106.248 208.788,102.641 230.251,102.641 231.826,101.067
32V on Component Side "Component Side-No Net 2" (solid, pour order 3873): 201.651,108.331 201.701,108.382 217.754,108.382 231.902,108.382 234.747,105.537 233.705,104.496 201.445,104.496
GND on Component Side "Component Side-No Net 2" (solid, pour order 3838): 203.098,104.216 208.432,104.216 208.483,104.267 208.636,104.115 208.636,98.527 203.327,98.527 203.073,98.781
NetC27_2 on Component Side "Component Side-No Net 2" (solid, pour order 3822): 220.24,48.47 222.61,48.47 222.61,44.94 222.34,44.67 222.28,44.61 220.24,44.61
+5VBRTN on Component Side "Component Side-No Net 2" (solid, pour order 3831): 219.12,35.67 219.41,35.67 222.66,38.92 222.66,43.57 219.96,43.57 219.94,43.55 219.97,43.52 219.97,41.51 219.97,40.69 219.31,40.03
NetC4_C_2 on Component Side "Component Side-No Net 1" (solid, pour order 3937): 120.4,65.4 122,65.4 122.9,66.3 124.4,66.3 124.4,65.1 124,64.7 124,62.8 120.4,62.8
+5VARTN on Component Side "Component Side-No Net 1" (solid, pour order 3939): 107.6,40.4 133.5,40.4 133.771,40.671 133.771,44.971 136.3,44.971 136.3,37.6 135.2,36.5 107.6,36.5
NetC4_D_2 on Component Side "Component Side-No Net 1" (solid, pour order 3941): 88.6,65.3 90.2,65.3 91.2,66.3 92.6,66.3 92.6,65 92.2,64.6 92.2,62.7 88.6,62.7
-5VA on Component Side "Component Side-No Net 1" (solid, pour order 3945): 104.8,45.3 104.8,41.6 101.6,41.6 101.6,45.3
NetC4_A_2 on Component Side "Component Side-No Net 1" (solid, pour order 3947): 153.8,65.3 155.4,65.3 156.3,66.2 157.8,66.2 157.8,65 157.4,64.6 157.4,62.7 153.8,62.7
NetC4_B_2 on Component Side "Component Side-No Net 1" (solid, pour order 3949): 188.4,65.45 190,65.45 190.9,66.35 192.4,66.35 192.4,65.15 192,64.75 192,62.85 188.4,62.85
-5VB on Component Side "Component Side-No Net 1" (solid, pour order 3951): 175.5,40.6 200.8,40.6 201.071,40.871 201.071,45.171 203.6,45.171 203.6,37.8 202.5,36.7 175.5,36.7
+5VBRTN on Component Side "Component Side-No Net 1" (solid, pour order 3953): 169.8,45.5 169.8,41.8 166.6,41.8 166.6,45.5
GND on Signal Layer 1 "Component Side-No Net 2" (solid, pour order 3899): 23.27,109.06 239.31,109.06 239.31,11.49 239.16,11.34 23.13,11.34
+5V on Signal Layer 2 "Component Side-No Net 2" (solid, pour order 3900): 35.05,76.01 62.99,76.01 62.99,56.69 35.05,56.69

## Other copper
Component Side:
  pour cut-out: 43.3,16.58 43.3,13.13 50.63,13.13 50.63,16.566
  pour cut-out: 191.594,71.712 191.594,70.696 192.864,70.696 192.864,71.546 192.698,71.712
  pour cut-out: 157.154,71.542 157.154,70.526 158.424,70.526 158.424,71.376 158.258,71.542
  pour cut-out: 123.554,71.672 123.554,70.656 124.824,70.656 124.824,71.506 124.658,71.672
  pour cut-out: 91.834,71.692 91.834,70.676 93.104,70.676 93.104,71.526 92.938,71.692
  text "1" at 44.14,14.09 h1.52
Signal Layer 1:
  pour cut-out: 43.3,16.58 43.3,13.13 50.63,13.13 50.63,16.566
  text "2" at 45.31,14.08 h1.52
Signal Layer 2:
  text "3" at 46.97,14.09 h1.52
Bottom Layer:
  text "4" at 48.59,14.08 h1.52

## Silkscreen, mask and mechanical layers (free items; w line width, h text height)
Top Overlay:
  lines w0.254: 135.64,68.44 135.74,68.34
  text "Shield/GND" at 27.4,101.45 h0.8
  text "SCB" at 224.34,69.75 h1.52
  text "SCA" at 224.88,54.56 h1.52
  text "-5V A" at 30.48,43.688 h0.8
  text "+5V A" at 32.512,38.1 h0.8
  text "-5V B" at 31.75,32.004 h0.8
  text "+5V B" at 32.258,26.162 h0.8
  text "-5V B" at 83.55,24.35 h1.6
  text "+5V B" at 116.05,24.35 h1.6
  text "+5V A" at 149.45,24.35 h1.6
  text "-5V A" at 184.4,24.35 h1.6
  text "Shield/GND" at 27.95,17.7 h0.8
Top Solder:
  rectangle: 43.34,13.18 50.66,16.59
Solder Side:
  rectangle: 43.29,13.15 50.61,16.56
Mechanical 1:
  the board outline again, w0.127
Mechanical 6:
  lines w0.5: 22,109.982 22,10.414 22,10.352 22.352,10 172.974,10 242.062,10 242.062,110 22.018,110

## Text inside footprints (layer, text, board x,y; h text height)
LDO1: Top Overlay "2" at 45.629,57.023 h1.26; Top Overlay "1" at 43.467,57.032 h1.26; Top Overlay "4" at 48.825,63.89 h1.26; Top Overlay "3" at 47.961,57.032 h1.26